# EAGLE board Powerful Vihelmo-Habbi (EAGLE 9.7.0)

Size 168.34 x 129.39 mm. Coordinates in mm from the lower left corner, seen from the top.
Outline: 0,0 168.34,0 168.34,129.39 0,129.39 0,0
Copper layers (1*16): Top 0.035mm / dielectric 1.5mm / Bottom 0.035mm
Design rules "default": minimum track width 6mil, minimum drill 0.35mm, track to track 6mil, track to pad 6mil, pad to pad 6mil, via to via 6mil, smd to smd 6mil, copper to edge 40mil, drill to drill 6mil, minimum pad ring 10mil, minimum via ring 8mil, stop-mask expansion 4mil, vias tented up to drill 0mil, thermal gap 10mil

## Footprints (pad centres in the part's own frame; a part is rotated, then mirrored left to right if it is on the bottom)
LEDRD254W60D565H860B_G = drill 0.981 pad 1.581: 1 -1.27,0; 2 1.27,0
RESAD1016W63L850D250B = drill 0.83 pad 1.43: 1 -5.08,0; 2 5.08,0
SWITCH-MOMENTARY-PTH-6.5MM = drill 1.016 pad 1.88: 1 -3.251,2.261; 2 3.251,2.261; 3 -3.251,-2.261; 4 3.251,-2.261
DIP762W53P254L1969H508Q16B = drill 0.743 pad 1.343: 1 -3.81,8.89; 2 -3.81,6.35; 3 -3.81,3.81; 4 -3.81,1.27; 5 -3.81,-1.27; 6 -3.81,-3.81; 7 -3.81,-6.35; 8 -3.81,-8.89; 9 3.81,-8.89; 10 3.81,-6.35; 11 3.81,-3.81; 12 3.81,-1.27; 13 3.81,1.27; 14 3.81,3.81; 15 3.81,6.35; 16 3.81,8.89
ARDUINO-UNO-R3-SHIELD = drill 1.016 pad 1.88: 3.3V 24.13,-2.54; 5V 24.13,0; A0 24.13,12.7; A1 24.13,15.24; A2 24.13,17.78; A3 24.13,20.32; A4 24.13,22.86; A5 24.13,25.4; AREF -24.13,-13.97; D2 -24.13,20.32; D3 -24.13,17.78; D4 -24.13,15.24; D5 -24.13,12.7; D6 -24.13,10.16; D7 -24.13,7.62; D8 -24.13,3.81; D9 -24.13,1.27; D10 -24.13,-1.27; D11 -24.13,-3.81; D12 -24.13,-6.35; D13 -24.13,-8.89; GND@0 24.13,2.54; GND@1 24.13,5.08; GND@2 -24.13,-11.43; IOREF 24.13,-7.62; NC 24.13,-10.16; RES 24.13,-5.08; RX -24.13,25.4; SCL -24.13,-19.05; SDA -24.13,-16.51; TX -24.13,22.86; VIN 24.13,7.62

## Placement (x,y rotation side)
D1  GREEN  [LEDRD254W60D565H860B_G]  6.06,121.48 180 top
D2  GREEN  [LEDRD254W60D565H860B_G]  11.14,121.48 180 top
D3  GREEN  [LEDRD254W60D565H860B_G]  16.22,121.48 180 top
D4  GREEN  [LEDRD254W60D565H860B_G]  21.3,121.48 180 top
D5  GREEN  [LEDRD254W60D565H860B_G]  26.38,121.48 180 top
D6  GREEN  [LEDRD254W60D565H860B_G]  34,121.48 180 top
D7  GREEN  [LEDRD254W60D565H860B_G]  39.08,121.48 180 top
D8  GREEN  [LEDRD254W60D565H860B_G]  44.16,121.48 180 top
D9  GREEN  [LEDRD254W60D565H860B_G]  49.24,121.48 180 top
D10  GREEN  [LEDRD254W60D565H860B_G]  54.32,121.48 180 top
D11  GREEN  [LEDRD254W60D565H860B_G]  59.4,121.48 180 top
D12  GREEN  [LEDRD254W60D565H860B_G]  67.02,121.48 180 top
D13  GREEN  [LEDRD254W60D565H860B_G]  72.1,121.48 180 top
D14  GREEN  [LEDRD254W60D565H860B_G]  77.18,121.48 180 top
D16  GREEN  [LEDRD254W60D565H860B_G]  82.26,121.48 180 top
D17  GREEN  [LEDRD254W60D565H860B_G]  87.34,121.48 180 top
D18  GREEN  [LEDRD254W60D565H860B_G]  92.42,121.48 180 top
R1  330  [RESAD1016W63L850D250B]  7.33,113.86 90 top
R2  330  [RESAD1016W63L850D250B]  12.41,113.86 90 top
R3  330  [RESAD1016W63L850D250B]  17.49,113.86 90 top
R4  330  [RESAD1016W63L850D250B]  22.57,113.86 90 top
R5  330  [RESAD1016W63L850D250B]  27.65,113.86 90 top
R6  330  [RESAD1016W63L850D250B]  35.27,113.86 90 top
R7  330  [RESAD1016W63L850D250B]  40.35,113.86 90 top
R8  330  [RESAD1016W63L850D250B]  45.43,113.86 90 top
R9  330  [RESAD1016W63L850D250B]  50.51,113.86 90 top
R10  330  [RESAD1016W63L850D250B]  55.59,113.86 90 top
R11  330  [RESAD1016W63L850D250B]  60.67,113.86 90 top
R12  330  [RESAD1016W63L850D250B]  68.29,113.86 90 top
R13  330  [RESAD1016W63L850D250B]  73.37,113.86 90 top
R14  330  [RESAD1016W63L850D250B]  78.45,113.86 90 top
R15  330  [RESAD1016W63L850D250B]  83.53,113.86 90 top
R16  330  [RESAD1016W63L850D250B]  88.61,113.86 90 top
R17  330  [RESAD1016W63L850D250B]  93.69,113.86 90 top
S2  SWITCH_MOMENTARY  [SWITCH-MOMENTARY-PTH-6.5MM]  126.93,36.92 180 top
S3  SWITCH_MOMENTARY  [SWITCH-MOMENTARY-PTH-6.5MM]  127.22,26.09 0 top
U1  74HC595_PDIP  [DIP762W53P254L1969H508Q16B]  107.66,115.13 90 top
U2  74HC595_PDIP  [DIP762W53P254L1969H508Q16B]  130.52,115.13 90 top
U3  74HC595_PDIP  [DIP762W53P254L1969H508Q16B]  153.38,115.13 90 top
U4  ARDUINO-UNO-R3-SHIELD  [ARDUINO-UNO-R3-SHIELD]  73.25,29.84 270 top

## Library data of the parts
D1-D14 D16-D18 = Tinkercad; CATEGORY: Opto-Electronic; SUB-CATEGORY: LED; VALUE: LED_GREEN
R1-R17 S2 S3 U1-U4 = Tinkercad

## Nets
D1_A: D1.1 R1.2
D2_A: D2.1 R2.2
D3_A: D3.1 R3.2
D4_A: D4.1 R4.2
D5_A: D5.1 R5.2
D6_A: D6.1 R6.2
D7_A: D7.1 R7.2
D8_A: D8.1 R8.2
D9_A: D9.1 R9.2
D10_A: D10.1 R10.2
D11_A: D11.1 R11.2
D12_A: D12.1 R12.2
D13_A: D13.1 R13.2
D14_A: D14.1 R14.2
D16_A: D16.1 R15.2
D17_A: D17.1 R16.2
D18_A: D18.1 R17.2
U1_Q0: R5.1 U1.15
U1_Q1: R4.1 U1.1
U1_Q2: R3.1 U1.2
U1_Q3: R2.1 U1.3
U1_Q4: R1.1 U1.4
U1_Q7S: U1.9 U2.14
U2_Q0: R11.1 U2.15
U2_Q1: R10.1 U2.1
U2_Q2: R9.1 U2.2
U2_Q3: R8.1 U2.3
U2_Q4: R7.1 U2.4
U2_Q5: R6.1 U2.5
U2_Q7S: U2.9 U3.14
U3_Q0: R17.1 U3.15
U3_Q1: R16.1 U3.1
U3_Q2: R15.1 U3.2
U3_Q3: R14.1 U3.3
U3_Q4: R13.1 U3.4
U3_Q5: R12.1 U3.5
U4_5V: U1.10 U1.16 U2.10 U2.16 U3.10 U3.16 U4.5V
U4_D2: S2.4 U4.D2
U4_D3: S3.1 U4.D3
U4_D8: U1.14 U4.D8
U4_D9: U1.11 U2.11 U3.11 U4.D9
U4_D10: U1.12 U2.12 U3.12 U4.D10
U4_GND: D1.2 D2.2 D3.2 D4.2 D5.2 D6.2 D7.2 D8.2 D9.2 D10.2 D11.2 D12.2 D13.2 D14.2 D16.2 D17.2 D18.2 S2.2 S3.3 U1.8 U1.13 U2.8 U2.13 U3.8 U3.13 U4.GND@0 U4.GND@1 U4.GND@2

## Tracks (layer width: path | path; a pad name or v marks a point on that pad's centre or on a via)
D1_A  (1 unrouted)
D2_A  (1 unrouted)
D3_A  (1 unrouted)
D4_A  (1 unrouted)
D5_A  (1 unrouted)
D6_A  (1 unrouted)
D7_A  (1 unrouted)
D8_A  (1 unrouted)
D9_A  (1 unrouted)
D10_A  (1 unrouted)
D11_A  (1 unrouted)
D12_A  (1 unrouted)
D13_A  (1 unrouted)
D14_A  (1 unrouted)
D16_A  (1 unrouted)
D17_A  (1 unrouted)
D18_A  (1 unrouted)
U1_Q0  (1 unrouted)
U1_Q1  (1 unrouted)
U1_Q2  (1 unrouted)
U1_Q3  (1 unrouted)
U1_Q4  (1 unrouted)
U1_Q7S  (1 unrouted)
U2_Q0  (1 unrouted)
U2_Q1  (1 unrouted)
U2_Q2  (1 unrouted)
U2_Q3  (1 unrouted)
U2_Q4  (1 unrouted)
U2_Q5  (1 unrouted)
U2_Q7S  (1 unrouted)
U3_Q0  (1 unrouted)
U3_Q1  (1 unrouted)
U3_Q2  (1 unrouted)
U3_Q3  (1 unrouted)
U3_Q4  (1 unrouted)
U3_Q5  (1 unrouted)
U4_5V  (6 unrouted)
U4_D2  (1 unrouted)
U4_D3  (1 unrouted)
U4_D8  (1 unrouted)
U4_D9  (3 unrouted)
U4_D10  (3 unrouted)
U4_GND  (27 unrouted)